# EAGLE board ProcessingUnitRouted (EAGLE 9.6.2)
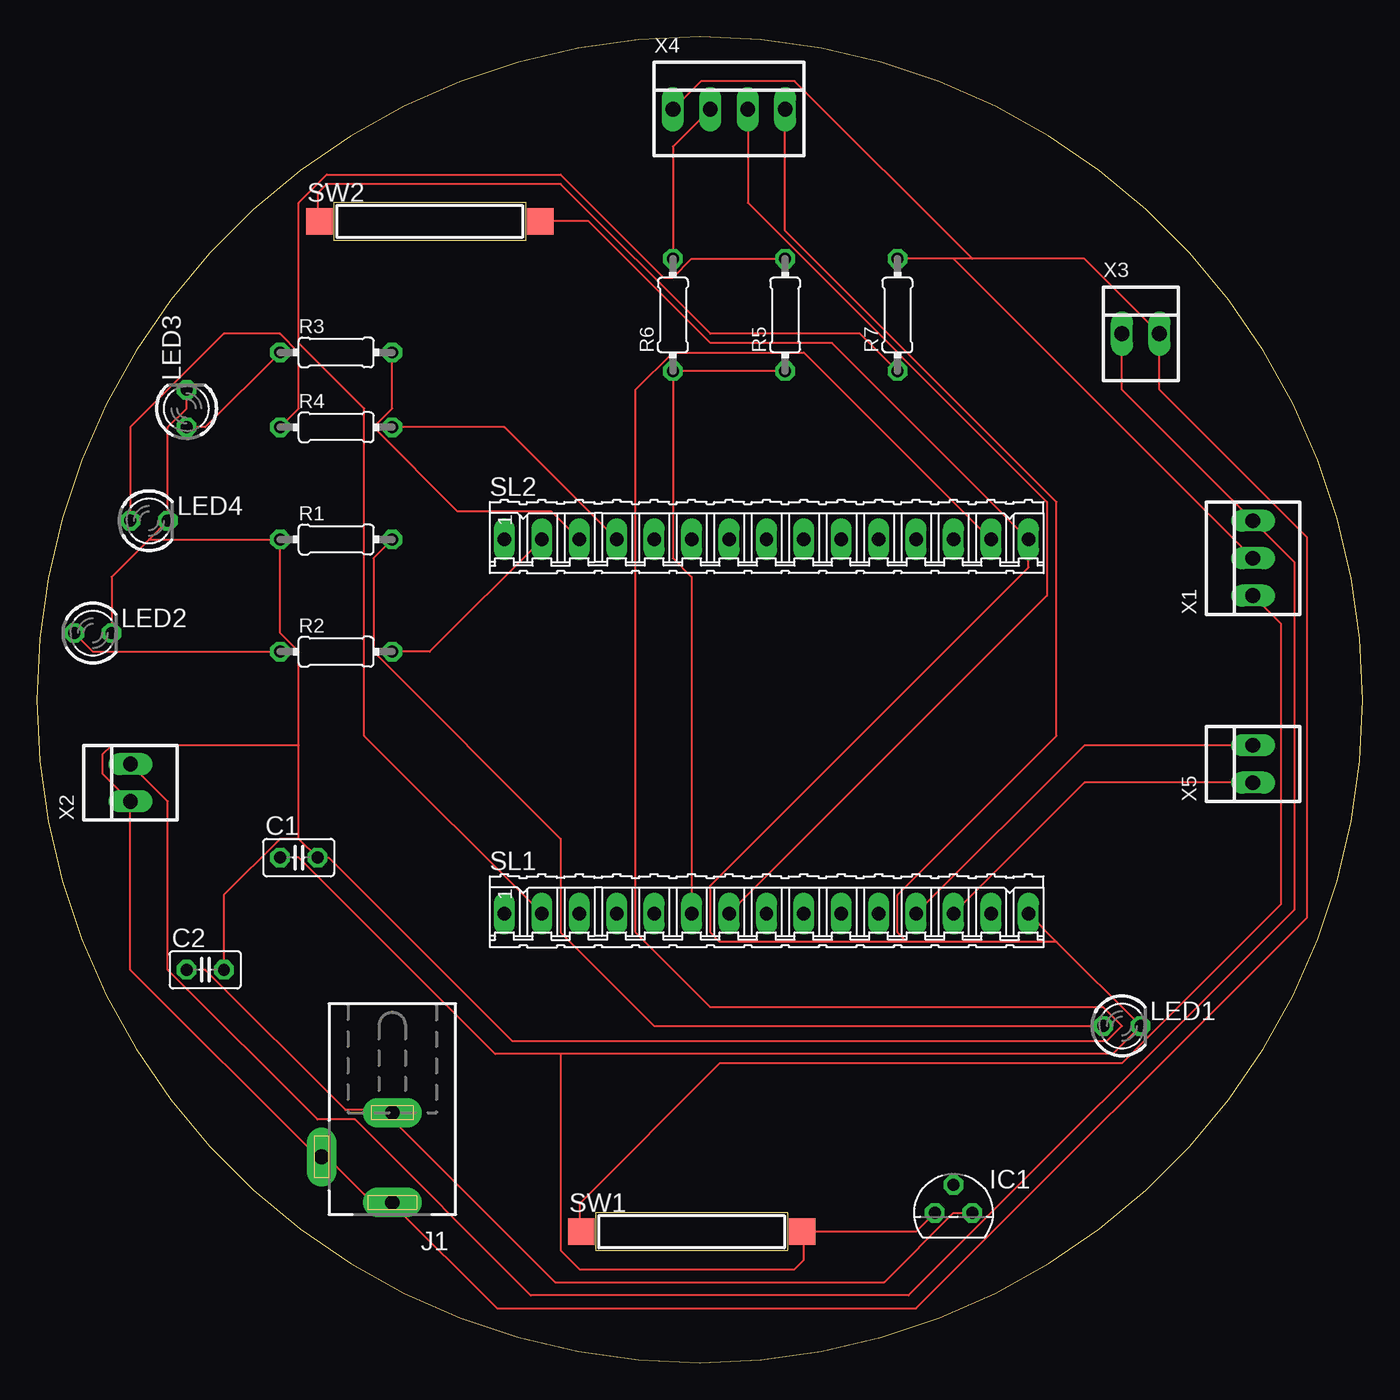
[diagram p0: board, top side]

Size 90 x 90 mm. Coordinates in mm from the lower left corner, seen from the top.
Outline: 45,90 arc90 0,45 arc90 45,0 arc90 90,45 arc90 45,90
Copper layers (1*16): Top 0.035mm / dielectric 1.5mm / Bottom 0.035mm
Design rules "default": minimum track width 6mil, minimum drill 0.35mm, track to track 6mil, track to pad 6mil, pad to pad 6mil, via to via 6mil, smd to smd 6mil, copper to edge 40mil, drill to drill 6mil, minimum pad ring 10mil, minimum via ring 8mil, stop-mask expansion 4mil, vias tented up to drill 0mil, thermal gap 10mil

## Footprints (pad centres in the part's own frame; a part is rotated, then mirrored left to right if it is on the bottom)
C025-025X050 = drill 0.813 octagon: 1 -1.27,0; 2 1.27,0
TO92 = drill 0.813 octagon: 1 -1.27,0; 2 0,1.905; 3 1.27,0
DCJ0202 = drill 1 pad 2 long: 1 0,3.1; 2 4.8,0; 3 0,-3
LED3MM = drill 0.813 octagon: A -1.27,0; K 1.27,0
0204/7 = drill 0.813 octagon: 1 -3.81,0; 2 3.81,0
15P = drill 0.914 long: 1 -17.78,0; 2 -15.24,0; 3 -12.7,0; 4 -10.16,0; 5 -7.62,0; 6 -5.08,0; 7 -2.54,0; 8 0,0; 9 2.54,0; 10 5.08,0; 11 7.62,0; 12 10.16,0; 13 12.7,0; 14 15.24,0; 15 17.78,0
CT10-XXXX-A2 = smd 1.8 x 1.8: 1 -7.5,0; 2 7.5,0
22-23-2031 = drill 1 long: 1 -2.54,0; 2 0,0; 3 2.54,0
22-23-2021 = drill 1 long: 1 -1.27,0; 2 1.27,0
22-23-2041 = drill 1 long: 1 -3.81,0; 2 -1.27,0; 3 1.27,0; 4 3.81,0

## Placement (x,y rotation side)
C1  100u  [C025-025X050]  17.78,34.29 0 top
C2  470u  [C025-025X050]  11.43,26.67 0 top
IC1  7805L  [TO92]  62.23,10.16 0 top
J1  DCJ0202  [DCJ0202]  24.13,13.97 180 top
LED1  TLLG4400  [LED3MM]  73.66,22.86 0 top
LED2  TLLR4400  [LED3MM]  3.81,49.53 0 top
LED3  TLLG4400  [LED3MM]  10.16,64.77 90 top
LED4  TLLY4400  [LED3MM]  7.62,57.15 0 top
R1  220  [0204/7]  20.32,55.88 0 top
R2  220  [0204/7]  20.32,48.26 0 top
R3  220  [0204/7]  20.32,68.58 0 top
R4  220  [0204/7]  20.32,63.5 0 top
R5  20k  [0204/7]  50.8,71.12 90 top
R6  10k  [0204/7]  43.18,71.12 90 top
R7  10k  [0204/7]  58.42,71.12 90 top
SL1  [15P]  49.53,30.48 0 top
SL2  [15P]  49.53,55.88 0 top
SW1  CT10-XXXX-A2  [CT10-XXXX-A2]  44.45,8.89 0 top
SW2  CT10-XXXX-A2  [CT10-XXXX-A2]  26.67,77.47 0 top
X1  22-23-2031  [22-23-2031]  82.55,54.61 90 top
X2  22-23-2021  [22-23-2021]  6.35,39.37 90 top
X3  22-23-2021  [22-23-2021]  74.93,69.85 0 top
X4  22-23-2041  [22-23-2041]  46.99,85.09 0 top
X5  22-23-2021  [22-23-2021]  82.55,40.64 90 top

## Library data of the parts
C1 C2 = rcl; SPICEPREFIX: C
IC1 = linear
J1 = con-jack; OC_FARNELL: unknown; OC_NEWARK: unknown
LED1 LED3 = led; MF: VISHAY SEMICONDUCTOR; OC_FARNELL: 1612435
LED2 = led; MF: VISHAY SEMICONDUCTOR; OC_FARNELL: 1612437
LED4 = led; MF: VISHAY SEMICONDUCTOR; OC_FARNELL: 1612439
R1 = rcl; SPICEPREFIX: R
R2-R7 = resistor
SL1 SL2 = con-amp-quick; OC_FARNELL: unknown; OC_NEWARK: unknown
SW1 SW2 = switch-coto
X1 = con-molex; MF: MOLEX; MPN: 22-23-2031; OC_FARNELL: 1462950; OC_NEWARK: 30C0862
X2 X3 X5 = con-molex; MF: MOLEX; MPN: 22-23-2021; OC_FARNELL: 1462926; OC_NEWARK: 25C3832
X4 = con-molex; MF: MOLEX; MPN: 22-23-2041; OC_FARNELL: 1462920; OC_NEWARK: 38C0355

## Nets
N$1: SL1.13 X5.1
N$2: R5.2 SL1.2
N$3: LED1.A R1.2
N$4: C2.1 IC1.3 J1.3
N$5: SW1.1 X1.1
N$6: LED2.A R2.1
N$7: X1.3 X2.2 X3.1
N$8: R2.2 SL2.2
N$9: R3.2 SL2.3
N$10: R4.2 SL2.4
N$11: LED3.A R3.1
N$12: LED4.A R4.1
N$13: C1.2 C2.2 J1.1 J1.2 LED2.K LED3.K LED4.K R1.1 R7.2 SL2.14 X1.2 X2.1 X3.2 X4.1
N$14: R5.1 R6.1 SL1.6
N$15: R7.1 SW2.1
N$16: R6.2 X4.2
N$17: SL1.7 X4.3
N$18: C1.1 IC1.1 LED1.K SL1.15 SL2.15 SW1.2 SW2.2 X4.4
N$19: SL1.12 X5.2

## Tracks (layer width: path | path; a pad name or v marks a point on that pad's centre or on a via)
N$1
  Top 0.152: SL1.13 71.12,39.37 X5.1
N$2
  Top 0.152: R5.2 44.45,74.93 43.18,73.66 42.55,73.66 35.56,80.64 19.68,80.64 17.78,78.74 17.78,69.22 22.23,64.77 22.23,42.55 SL1.2
N$3
  Top 0.152: LED1.A 41.91,22.86 35.56,29.21 35.56,35.56 22.86,48.26 22.86,54.61 R1.2
N$4
  Top 0.152: IC1.3 62.23,10.16 57.53,5.46 35.18,5.46 24.13,16.51 J1.3 24.13,17.14 20.95,17.14 11.43,26.67 C2.1
N$5
  Top 0.152: X1.1 84.45,50.16 84.45,31.11 73.66,20.32 46.35,20.32 36.83,10.79 36.83,8.89 SW1.1
N$6
  Top 0.152: R2.1 3.81,48.26 LED2.A
N$7
  Top 0.152: X2.2 8.89,38.1 8.89,26.67 19.05,16.51 21.59,16.51 33.53,4.57 59.18,4.57 85.34,30.73 85.34,54.36 X1.3 73.66,66.04 X3.1
N$8
  Top 0.152: R2.2 26.67,48.26 SL2.2
N$9
  Top 0.152: R3.2 24.13,64.77 22.86,63.5 28.57,57.78 34.92,57.78 SL2.3
N$10
  Top 0.152: R4.2 31.75,63.5 SL2.4
N$11
  Top 0.152: LED3.A 11.43,63.5 R3.1
N$12
  Top 0.152: LED4.A 6.35,63.5 12.7,69.85 16.51,69.85 17.78,68.58 17.78,64.77 R4.1
N$13
  Top 0.152: 63.5,74.93 71.12,74.93 X3.2 76.2,66.04 86.23,56.01 86.23,30.23 59.69,3.68 31.24,3.68 24.13,10.79 J1.1 24.13,11.43 22.23,11.43 19.68,13.97 J1.2 19.05,13.97 6.35,26.67 X2.1 4.45,40.01 4.45,41.27 5.08,41.91 17.78,41.91 | 63.5,74.93 62.23,74.93 | 62.23,74.93 R7.2 | X4.1 45.09,87 51.44,87 63.5,74.93 | 62.23,74.93 X1.2 | LED2.K 5.08,53.34 7.62,55.88 | 7.62,55.88 LED4.K 8.89,63.5 10.16,64.77 LED3.K | 7.62,55.88 R1.1 16.51,49.53 17.78,48.26 17.78,41.91 | C2.2 12.7,31.75 16.51,35.56 17.78,35.56 | 17.78,35.56 C1.2 19.81,34.29 32.26,21.84 72.64,21.84 73.66,22.86 72.39,24.13 45.72,24.13 40.64,29.21 40.64,66.04 43.18,68.58 52.07,68.58 SL2.14 | 17.78,35.56 17.78,41.91
N$14
  Top 0.152: R5.1 R6.1 43.18,54.61 44.45,53.34 SL1.6
N$15
  Top 0.152: R7.1 55.88,69.85 45.72,69.85 35.56,80.01 19.68,80.01 19.05,79.38 19.05,77.47 SW2.1
N$16
  Top 0.152: R6.2 43.18,82.55 X4.2
N$17
  Top 0.152: SL1.7 68.58,52.07 68.58,58.42 48.26,78.74 X4.3
N$18
  Top 0.152: SW2.2 37.47,77.47 45.72,69.22 53.98,69.22 SL2.15 67.31,53.98 45.72,32.38 45.72,29.21 46.35,28.57 59.05,28.57 | 52.07,8.89 59.69,8.89 IC1.1 | SL1.15 69.22,28.57 | 69.22,28.57 LED1.K 73.03,20.95 35.56,20.95 | C1.1 17.78,34.29 31.11,20.95 35.56,20.95 | X4.4 50.8,76.83 69.22,58.42 69.22,42.55 58.42,31.75 58.42,29.21 59.05,28.57 | 69.22,28.57 59.05,28.57 | 52.07,8.89 52.07,6.99 51.44,6.35 36.83,6.35 35.56,7.62 35.56,20.95 | 52.07,8.89 SW1.2
N$19
  Top 0.152: SL1.12 71.12,41.91 X5.2